# EAGLE board hemera_charger_A (EAGLE 6.1)
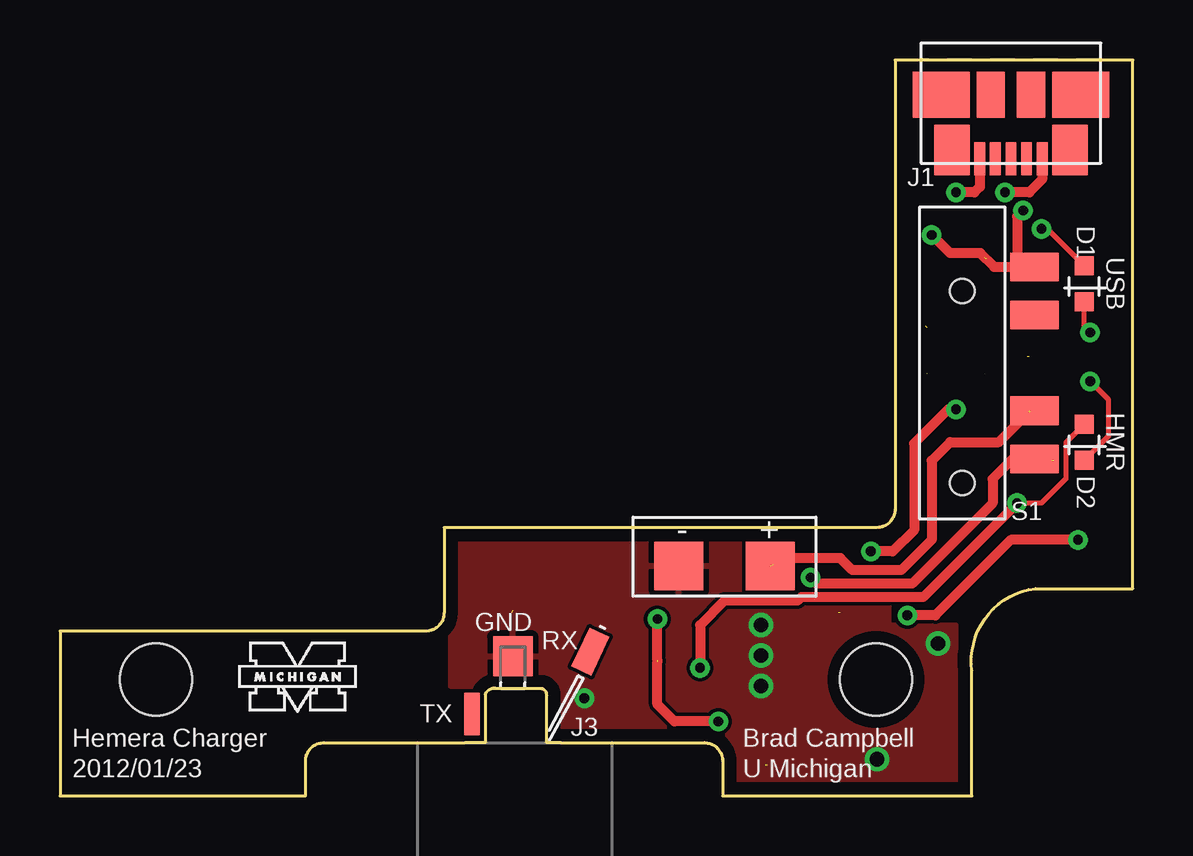
[diagram p0: board, top side]
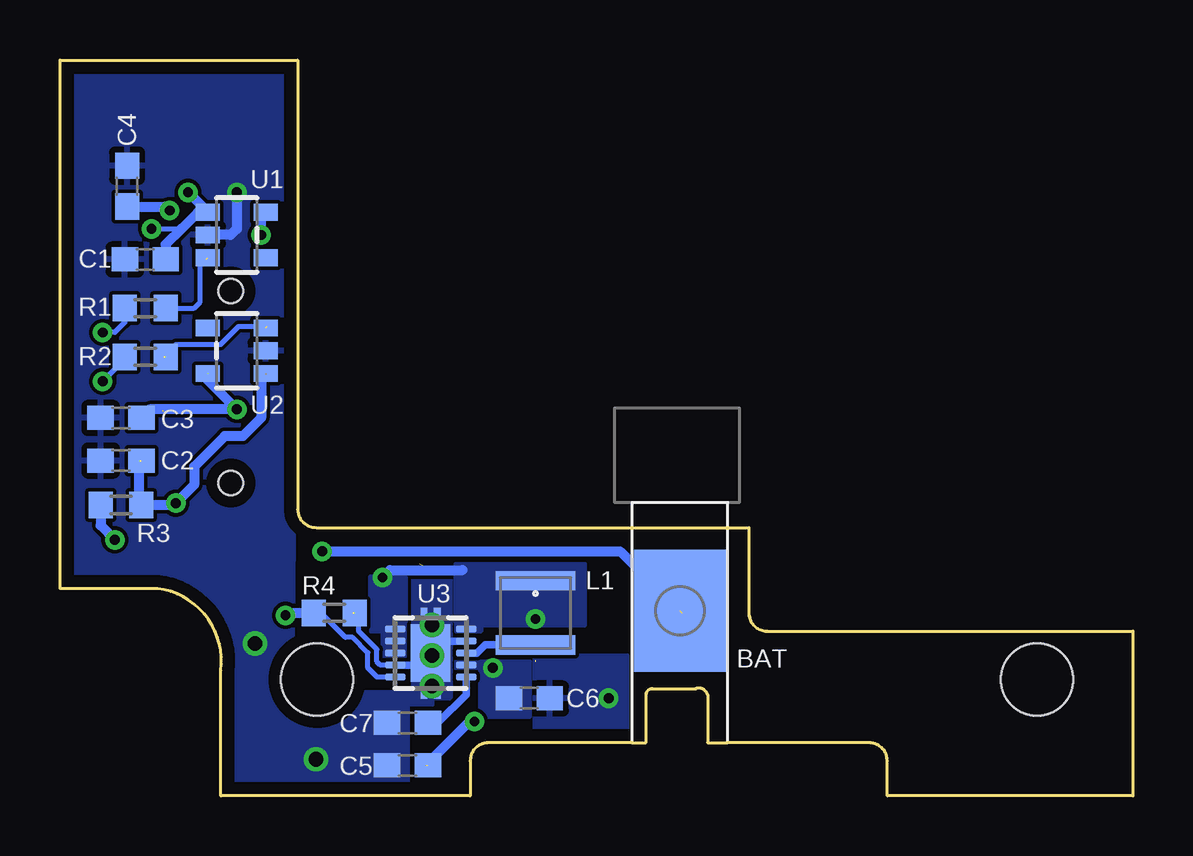
[diagram p1: board, bottom side, seen from below]

Size 44.7 x 30.66 mm. Coordinates in mm from the lower left corner, seen from the top.
Outline: 16.87,2.21 11,2.21 arc90 10.23,1.45 10.23,0 0,0 0,6.86 15.24,6.86 arc90 16,7.62 16,11.18 34.04,11.18 arc90 34.8,11.94 34.8,30.66 44.7,30.66 44.7,8.64 40.64,8.64 arc90 38,5.22 38,0 27.61,0 27.61,1.45 arc90 26.85,2.21 20.88,2.21
Copper layers (1*16): Top 0.0178mm / dielectric 59mil / Bottom 0.0178mm
Design rules: minimum track width 6mil, minimum drill 14mil, track to track 6mil, track to pad 6mil, pad to pad 6mil, via to via 6mil, smd to smd 6mil, copper to edge 20mil, drill to drill 16mil, minimum pad ring 8mil, minimum via ring 8mil, stop-mask expansion 3mil, vias tented up to drill 30mil, thermal gap 10mil
Holes 3 mm at 4,4.85 34,4.85

## Footprints (pad centres in the part's own frame; a part is rotated, then mirrored left to right if it is on the bottom)
BATTERY_0.08INCH = smd 2.032 x 2.032: NEG 1.905,0; POS -1.905,0
C0603 = smd 1.1 x 1: 1 -0.85,0; 2 0.85,0
LED-0603 = smd 0.8 x 0.8: A 0,-0.75; C 0,0.75
MOLEX_MICRO_USB_B_047346 = smd 1.38 x 0.45: D+ 2.66,0; D- 2.66,0.65; GND 2.66,-1.3; ID 2.66,-0.65; VCC 2.66,1.3 | smd 1.9 x 2.375: P$1 0,2.913; P$5 0,-2.913 | smd 2.1 x 1.475: P$2 2.3,2.462; P$6 2.3,-2.462 | smd 1.9 x 1.175: P$3 0,-0.838; P$4 0,0.838
PLUGBOARDCONNECTOR_SUNSTONE = smd 1.778 x 0.914 rotated 155: COMM 3.799,-3.103 | smd 1.651 x 1.651: L 3.601,0.127 | smd 5.08 x 3.81 bottom: MIC 5.501,0.127 | smd 1.778 x 0.635: R 1.201,1.833
LPS3015 = smd 0.8 x 3.3: P1 -1.335,0; P2 1.335,0
R0603 = smd 1 x 1.1: 1 -0.85,0; 2 0.85,0
ESWITCH_EG1381 = smd 2.007 x 1.194: 1 3.01,4; 2 3.01,1.994; 3 3.01,-1.994; 4 3.01,-4 | hole 1.016: 0,2.997; 0,-5.004
SOT23-5 = smd 0.7 x 1: 1 0.95,1.2; 2 0,1.2; 3 -0.95,1.2; 4 -0.95,-1.2; 5 0.95,-1.2
S-PDSO-N10 = smd 0.28 x 0.85: 1 -1,-1.475; 2 -0.5,-1.475; 3 0,-1.475; 4 0.5,-1.475; 5 1,-1.475; 6 1,1.475; 7 0.5,1.475; 8 0,1.475; 9 -0.5,1.475; 10 -1,1.475 | smd 2.4 x 1.65: PP 0,0 | smd 3.8 x 0.28: PP@1 0,0.275; PP@2 0,-0.275

## Placement (x,y rotation side)
B1  BATTERY_0.08INCH  [BATTERY_0.08INCH]  27.69,9.58 180 top
C1  1uF  [C0603]  41.15,22.35 180 bottom
C2  1uF  [C0603]  42.16,13.97 180 bottom
C3  1uF  [C0603]  42.16,15.75 180 bottom
C4  1uF  [C0603]  41.91,25.4 90 bottom
C5  10uF  [C0603]  30.23,1.27 180 bottom
C6  22uF  [C0603]  25.15,4.06 0 bottom
C7  0.1uF  [C0603]  30.23,3.05 180 bottom
D1  [LED-0603]  42.67,21.34 180 top
D2  [LED-0603]  42.67,14.73 180 top
J1  MOLEX_MICRO_USB_B_047346  [MOLEX_MICRO_USB_B_047346]  39.62,29.21 270 top
J3  [PLUGBOARDCONNECTOR_SUNSTONE]  19,2.21 90 top
L1  LPC3015-222ML  [LPS3015]  24.89,7.62 270 bottom
R1  1k  [R0603]  41.15,20.32 0 bottom
R2  1k  [R0603]  41.15,18.29 0 bottom
R3  1.8M  [R0603]  42.16,12.12 180 bottom
R4  200k  [R0603]  33.27,7.62 0 bottom
S1  ESWITCH_EG1381A  [ESWITCH_EG1381]  37.59,18.03 0 top
U1  MAX1555  [SOT23-5]  37.34,23.37 90 bottom
U2  MAX1555  [SOT23-5]  37.34,18.54 270 bottom
U3  TPS61200  [S-PDSO-N10]  29.26,5.94 90 bottom
U$1  [UMICH]  7.37,3.3 0 top

## Library data of the parts
B1 J1 S1 U1 U2 = brad
C1-C7 R1-R4 = rcl
D1 D2 = berkeley-epic
J3 = Thomas
L1 = fm_usb_receiver
U3 = texas; MPN: TPS61200DRCT; OC_FARNELL: 1471238; OC_NEWARK: 37M0066
U$1 = umich

## Nets
BBAT: B1.POS S1.3
BBAT_5V: C2.1 C6.1 D2.A R3.1 U2.1 U3.2
BBAT_CHG: C5.1 L1.P1 S1.4 U3.5 U3.6 U3.7 U3.8
COMMON: J3.COMM
FB: R3.2 R4.1 U3.10
GND: B1.NEG C1.2 C2.2 C3.2 C4.2 C5.2 C6.2 C7.2 J1.GND J3.L U1.2 U2.2 U3.4 U3.PP U3.PP@1 U3.PP@2
L: L1.P2 U3.3
N$1: C1.1 D1.A J1.VCC U1.1
N$2: R2.2 U2.3
N$3: C3.1 J3.MIC U2.5
N$4: R1.2 U1.3
N$5: D1.C R1.1
N$6: R4.2 U3.9
N$7: D2.C R2.1
USB_CHG: C4.1 S1.1 U1.5
VAUX: C7.1 U3.1

## Tracks (layer width: path | path; a pad name or v marks a point on that pad's centre or on a via)
BBAT  (2 unrouted)
  Top 0.406: 40.42,16.04 S1.3 | 40.39,16 39.12,14.73 37.08,14.73 36.32,13.97 36.32,10.67 35.05,9.4 33.02,9.4 32.51,9.91 29.97,9.91 29.72,9.65
BBAT_5V  (via drill 0.41)  (2 unrouted)
  Top 0.203: D2.A 41.91,14.72 41.91,13.21 40.89,12.19 v39.88,12.19
  Top 0.406: v39.88,12.19 35.97,8.28 30.89,8.28 30.73,8.13 27.69,8.13 26.67,7.11 v26.67,5.33
  Bottom 0.203: 41.31,13.88 C2.1 | R3.1 41.4,12.2 | 41.15,13.97 41.4,13.97
  Bottom 0.406: 41.4,12.2 41.4,13.97 | 36.07,17.53 36.12,17.58 36.12,17.6 36.32,17.4 36.32,15.75 37.08,14.99 37.85,14.99 39.12,13.72 39.12,12.95 v39.88,12.19 39.95,12.12 R3.1 41.24,12.19
  pour Bottom (no thermals): 25.15,5.59 25.15,3.3 27.18,3.3 27.18,5.33 28.19,5.33 28.19,5.59
BBAT_CHG  (via drill 0.41)  (2 unrouted)
  Top 0.406: 24.89,5.64 v24.89,7.37 | v27.43,3.1 25.6,3.1 24.89,3.81 24.89,5.59 | S1.4 39.69,14.03 38.86,13.21 38.86,12.19 35.51,8.84 31.52,8.84 v31.27,9.09
  Bottom 0.406: v27.43,3.1 27.64,3.1 29.46,1.27 | 27.94,9.4 30.96,9.4 v31.27,9.09
  pour Bottom (no thermals): 22.86,9.65 22.86,7.11 27.18,7.11 27.18,6.86 28.19,6.86 28.19,9.65
  pour Bottom (no thermals): 30.33,5.82 31.24,5.84 31.24,6.86 31.75,6.86 31.75,9.14 30.33,9.12
FB  (via drill 0.41)
  Top 0.406: v42.42,10.67 39.62,10.67 36.47,7.52 v35.31,7.52
  Bottom 0.203: U3.10 31.49,4.94 31.88,5.33 31.88,5.97 32.51,6.6 32.82,6.6 33.83,7.62 33.78,7.62
  Bottom 0.305: 34.14,7.62 R4.1 33.83,7.62
  Bottom 0.406: R3.2 43.01,11.26 v42.42,10.67 | v35.31,7.52 35.2,7.62 R4.1
GND  (via drill 0.41, 0.61)
  Top 0.406: J1.GND 38.32,25.37 38.1,25.15 v37.34,25.15
  Bottom 0.305: U3.4 29.24,6.44 U3.PP@2
  Bottom 0.406: v37.34,25.15 37.34,23.62 37.59,23.37 U1.2
  other vias: 21.84,4.06 34.04,1.52 36.58,6.35 29.21,7.11 29.21,5.84 29.21,4.57
  pour Bottom: 34.8,30.48 35.05,4.32 35.05,0.25 37.59,0.25 37.59,6.86 39.62,8.89 44.7,8.64 44.7,30.48
  pour Bottom (no thermals): 30.23,3.81 30.23,0.25 35.05,0.25 35.05,4.32 29.97,4.32 29.97,9.14 28.45,9.14 28.45,4.06 29.21,4.06 29.21,3.81
  pour Bottom: 21.08,5.84 21.08,2.54 24.89,2.54 24.89,5.84
  pour Top: 16.26,10.92 16.26,4.57 20.57,4.57 20.57,2.54 27.69,2.54 27.69,0 37.34,0 37.34,7.11 34.54,7.11 34.54,10.92
L
  Bottom 0.305: L1.P2 26.99,6.29 27.33,5.94 U3.3
N$1  (via drill 0.41)
  Top 0.203: D1.A 41.14,23.62 v40.89,23.62
  Top 0.406: J1.VCC 40.92,25.68 40.39,25.15 v39.37,25.15
  Bottom 0.203: 38.61,24.39 U1.1 | v40.89,23.62 39.65,23.62 39.64,23.64
  Bottom 0.406: 38.61,24.39 v39.37,25.15 | U1.1 38.95,24.32 39.64,23.64 40.3,22.97 C1.1
N$2  (2 unrouted)
  Bottom 0.203: 36.07,19.56 37.26,19.56 38.02,18.8 39.88,18.8 40.39,18.29
N$3  (via drill 0.41)  (2 unrouted)
  Top 0.406: v37.34,16.1 37.01,16.1 35.59,14.68 35.59,11.07 34.7,10.19 v33.78,10.19
  Bottom 0.203: 19.05,8.13 19.05,7.87
  Bottom 0.406: v33.78,10.19 21.36,10.19 19.05,7.87 18.8,7.62 18.8,7.87 | 18.8,7.87 19.05,8.13 | 19.05,8.13 19.05,8.38 | 19.05,8.64 19.05,8.38 | 19.05,8.38 18.54,7.87 18.8,7.87 | 18.8,7.87 19.05,7.62 19.05,8.13 | 19.05,8.38 18.54,8.38 18.29,8.13 | C3.1 41.33,15.75 40.97,16.1 v37.34,16.1 38.53,17.3 38.53,17.58 38.58,17.53 38.61,17.53
N$4  (1 unrouted)
  Bottom 0.203: R1.2 39.12,20.32 38.86,20.57 38.86,22.1 38.61,22.35
N$5  (via drill 0.41)
  Top 0.203: v42.93,19.3 42.67,19.56 D1.C
  Bottom 0.203: R1.1 42,19.72 42.42,19.3 v42.93,19.3
N$6  (1 unrouted)
  Bottom 0.203: U3.9 31.35,5.44 31.5,5.59 31.5,6.1 32.26,6.86 32.26,7.37 32.51,7.62
  Bottom 0.305: U3.9 29.46,5.44 29.46,5.59
N$7  (via drill 0.41)
  Top 0.203: D2.C 43.69,15 43.69,16.51 v42.93,17.27
  Bottom 0.203: R2.1 41.91,18.29 v42.93,17.27
USB_CHG  (via drill 0.41)
  Top 0.406: v36.32,23.37 37.08,22.61 38.35,22.61 38.92,22.04 39.88,22.04 | v40.13,24.38 39.88,24.13 39.88,22.04 | 39.88,22.04 S1.1
  Bottom 0.203: 36.32,24.13 U1.5
  Bottom 0.406: v36.32,23.37 36.32,24.13 | C4.1 40.3,24.55 v40.13,24.38
VAUX
  Bottom 0.305: C7.1 28.96,3.05 27.79,4.22 U3.1

## Text on the board
tNames: USB | HMR | GND | RX | TX | Hemera Charger | Brad Campbell | 2012/01/23 | U Michigan
bNames: BAT